# Altium PCB notus.PcbDoc
Units mil, origin at the board's own origin, x right, y up, seen from the top; angles counter-clockwise.
Board outline 3840 x 4540 mil, 2 copper layers (Top Layer, Bottom Layer); 131 components, 110 nets, 539 pads, 113 vias.
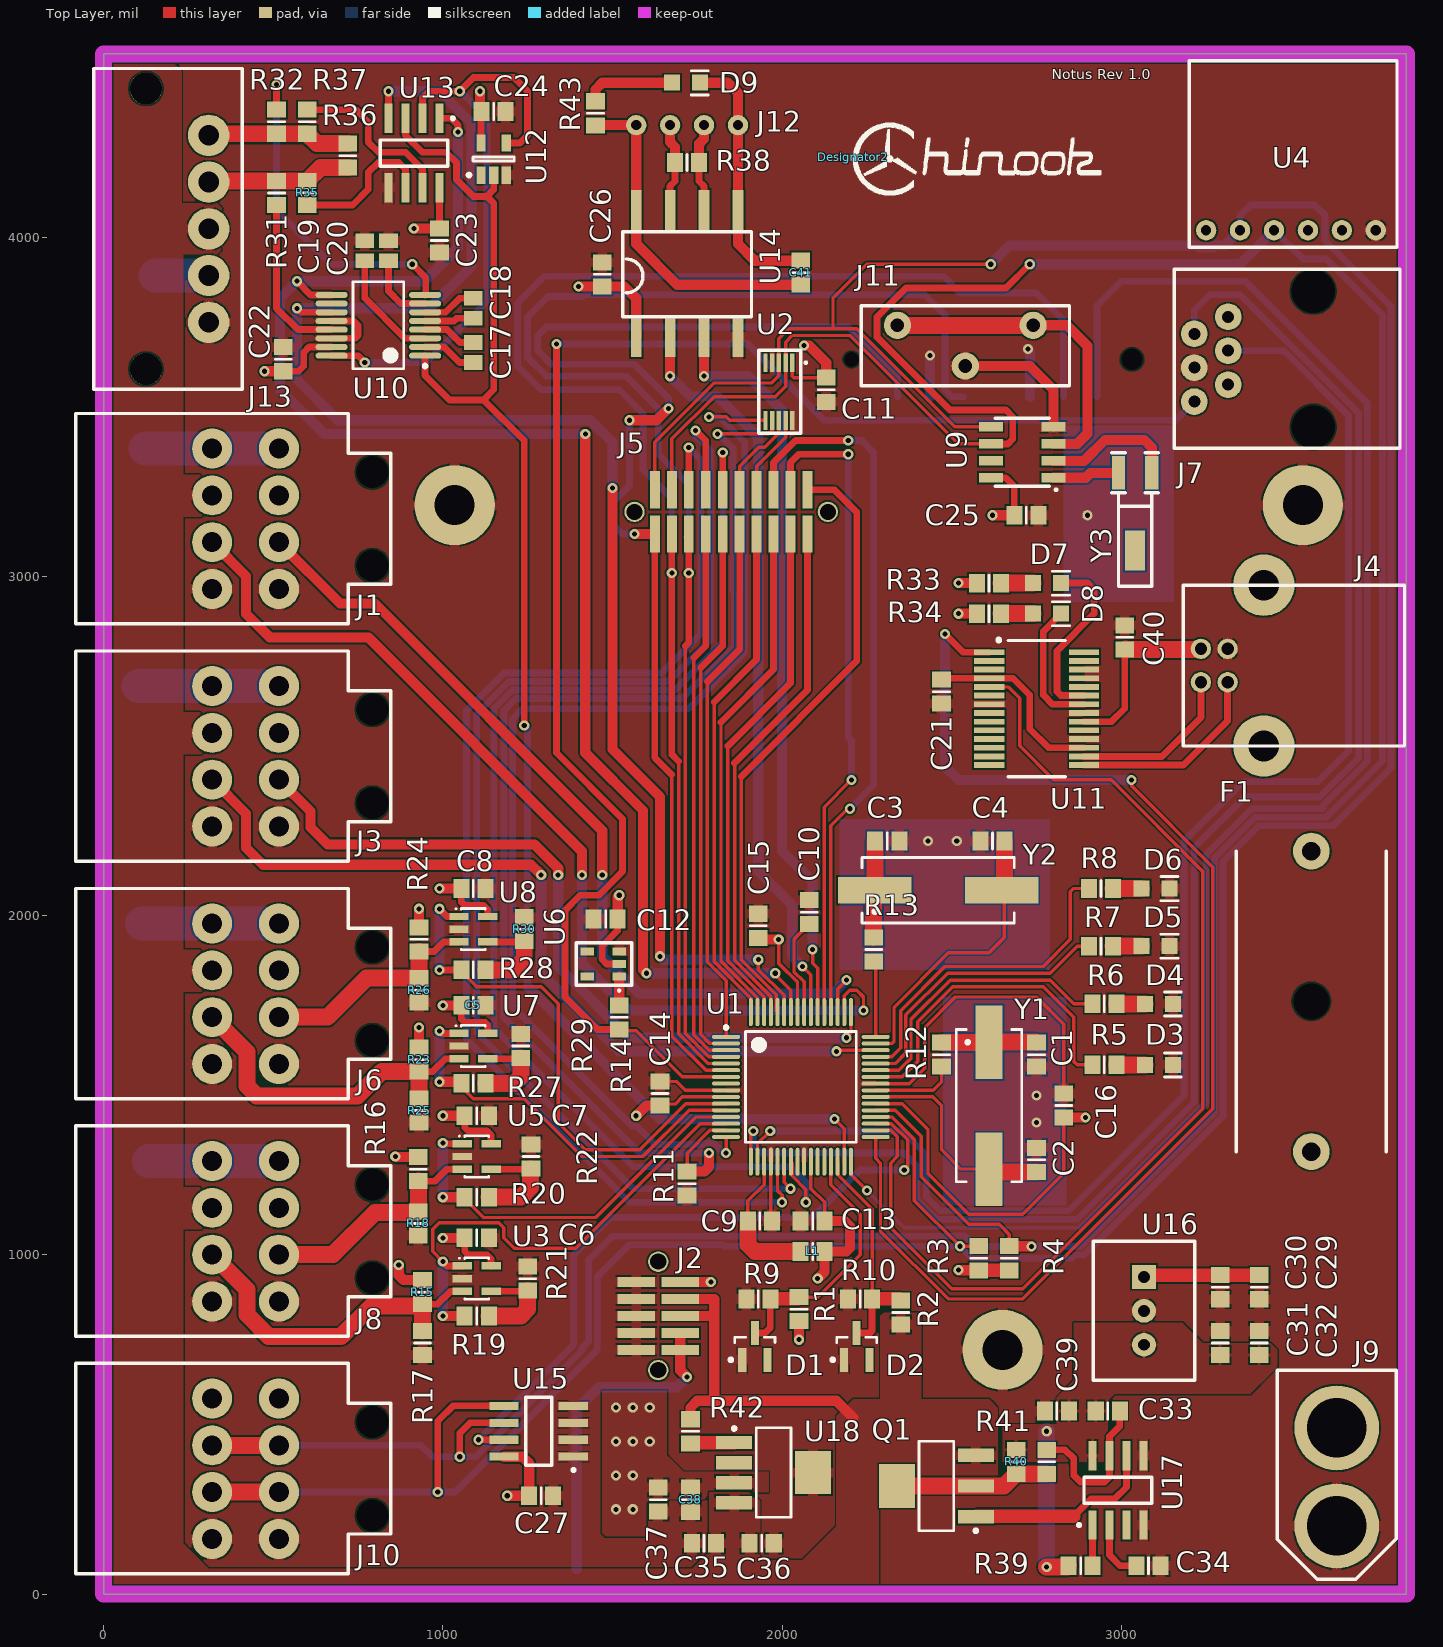
[diagram p0: Top Layer view]
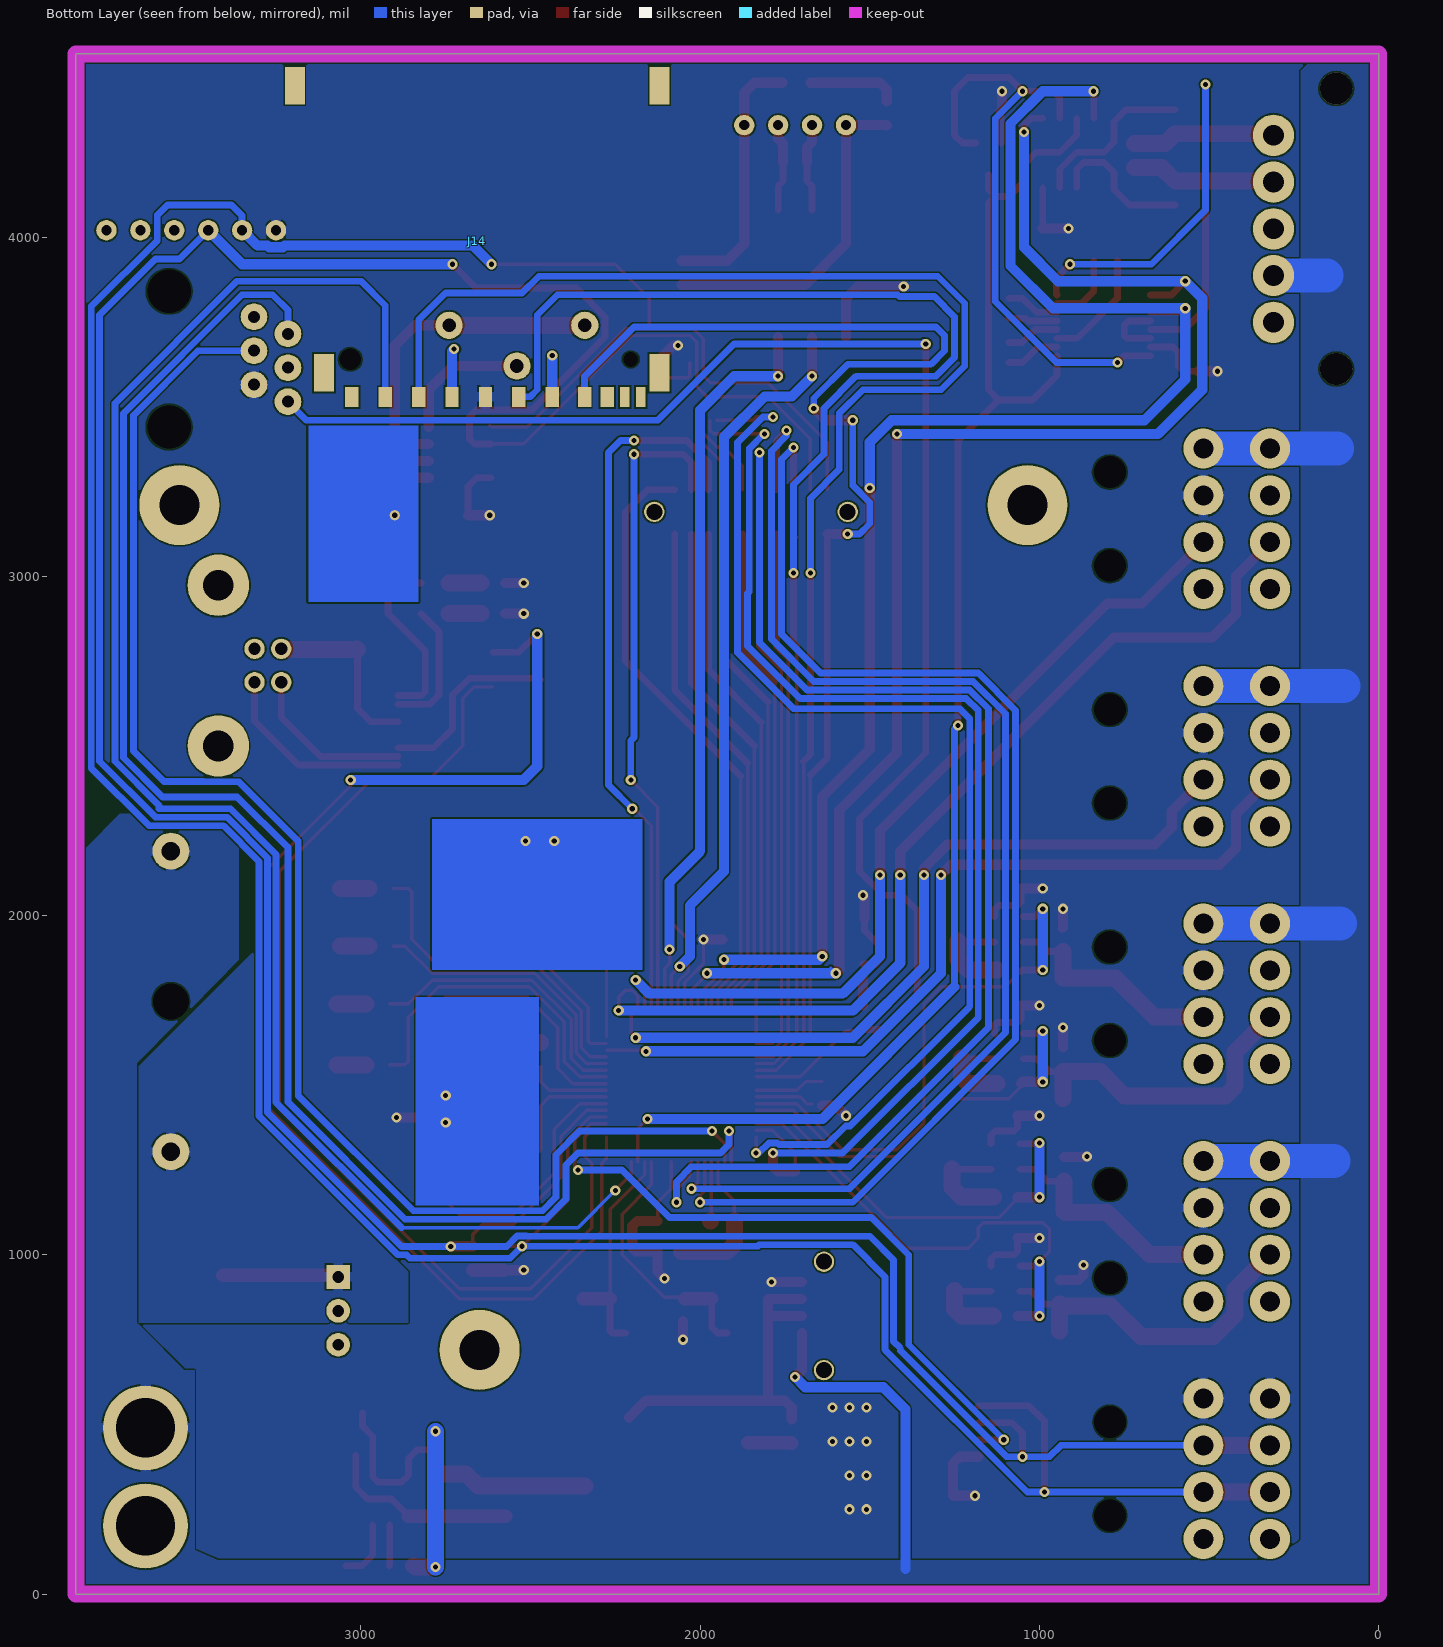
[diagram p1: Bottom Layer view, seen from below]

## Layer stack, top to bottom
Top Layer: signal copper 1.4
Dielectric: dielectric 12.6, FR-4, Dk 4.8
Bottom Layer: signal copper 1.4

## Board outline
0,0 0,4540 3840,4540 3840,0

## Design rules (kind name [scope] priority, off if disabled: settings)
Clearance [All] p1: gap=5
MinimumSolderMaskSliver [All] p1: minsoldermaskwidth=1
PlaneConnect [All] p1: planeconnectstyle=Relief reliefexpansion=20 reliefentries=4 reliefconductorwidth=30 reliefairgap=10
PolygonConnect [All] p1: connectstyle=Relief reliefconductorwidth=30 reliefentries=4 polygonreliefangle="90 Angle"
RoomDefinition Power [InComponentClass('Power')] p1: confinementstyle=ConfineIn formatcopy=TRUE lockcomponents=FALSE outline -820,-1000 15875,-1000 15875,9835 -820,9835
RoomDefinition Memory [InComponentClass('Memory')] p2: confinementstyle=ConfineIn formatcopy=TRUE lockcomponents=FALSE outline -770,-1000 15725,-1000 15725,9775 -770,9775
RoomDefinition MCU [InComponentClass('MCU')] p3: confinementstyle=ConfineIn formatcopy=TRUE lockcomponents=FALSE outline -889.57,-1000 16870,-1000 16870,10060 -889.57,10060
RoomDefinition Connectors [InComponentClass('Connectors')] p4: confinementstyle=ConfineIn formatcopy=TRUE lockcomponents=FALSE outline -890,-1000 16925,-1000 16925,10115 -890,10115
RoomDefinition Communication [InComponentClass('Communication')] p5: confinementstyle=ConfineIn formatcopy=TRUE lockcomponents=FALSE outline -890,-1000 16910,-1000 16910,10225 -890,10225
RoutingVias [All] p1: holewidth=28 width=50 viastyle="Through Hole" minholewidth=10 minwidth=20 maxholewidth=28 maxwidth=50
SilkToSilkClearance [All] p1: silktosilkclearance=7
SilkscreenOverComponentPads [All] p1: minsilkscreentomaskgap=7
SolderMaskExpansion [All] p1: expansion=4
Width [All] p1: maxlimit=500 minlimit=5 preferedwidth=20
24 further rules are at their usual default settings.

## Classes and differential pairs
component class Power: C29 C30 C31 C32 C33 C34 C35 C36 C37 C38 C39 F1 Q1 R39 R40 R41 R42 U16 U17 U18
component class Memory: C27 J14 U15
component class MCU: C1 C2 C3 C4 C5 C6 C7 C8 C9 C10 C11 C12 C13 C14 C15 C16 D1 D2 D3 D4 D5 D6 L1 R1 R2 R3 R4 R5 R6 R7 R8 R9 R10 R11 R12 R13 R14 R15 R16 R17 R18 R19 R20 R21 R22 R23 R24 R25 R26 R27 R28 R29 R30 U1 U2 U3 U4 U5 U6 U7 U8 U9 Y1 Y2 Y3
component class Connectors: J1 J2 J3 J4 J5 J6 J7 J8 J9 J10 J11 J12 J13
component class Communication: C17 C18 C19 C20 C21 C22 C23 C24 C25 C26 C40 C41 D7 D8 D9 R31 R32 R33 R34 R35 R36 R37 R38 R43 U10 U11 U12 U13 U14

## Components (designator, comment, footprint, x,y, rotation, side; value= is the part's Value field where it differs from the comment)
C1 "Cap" RESC2012N 2750,1590 r90 top
C2 "Cap" RESC2012N 2750,1280 r270 top
C3 "Cap" RESC2012N 2310,2220 r180 top
C4 "Cap" RESC2012N 2620,2220 r0 top
C5 "Cap" RESC2012N 1090,1735.43 r180 top
C6 "Cap" RESC2012N 1100,1050 r180 top
C7 "Cap" RESC2012N 1100,1410 r180 top
C8 "Cap" RESC2012N 1090,2080 r180 top
C9 "Cap" RESC2012N 1934.57,1100 r180 top
C10 "Cap" RESC2012N 2080,2010 r270 top
C11 "Cap" RESC2012N 2130,3550 r90 top
C12 "Cap" RESC2012N 1480,1990 r0 top
C13 "Cap" RESC2012N 2090,1100 r0 top
C14 "Cap" RESC2012N 1640,1475.43 r270 top
C15 "Cap" RESC2012N 1930,1970 r270 top
C16 "Cap" RESC2012N 2830,1440 r270 top
C17 "Cap" C0805 1090,3660 r90 top
C18 "Cap" C0805 1090,3790 r90 top
C19 "Cap" C0805 770,3960 r90 top
C20 "Cap" C0805 840,3960 r270 top
C21 "Cap" RESC2012N 2470,2660 r90 top
C22 "Cap" RESC2012N 530,3640 r270 top
C23 "Cap" RESC2012N 990,3990 r90 top
C24 "Cap" RESC2012N 1150,4370 r180 top
C25 "Cap" RESC2012N 2720,3180 r180 top
C26 "Cap" RESC2012N 1470,3890 r270 top
C27 "Cap" RESC2012N 1290,290 r180 top
C29 "Cap" RESC2012N 3406.38,904.57 r90 top
C30 "Cap" RESC2012N 3291.38,904.57 r90 top
C31 "Cap" RESC2012N 3291.38,740 r270 top
C32 "Cap" RESC2012N 3406.38,740 r270 top
C33 "Cap" RESC2012N 2960,540 r180 top
C34 "Cap" RESC2012N 3080,83.62 r180 top
C35 "Cap" RESC2012N 1770,150 r0 top
C36 "Cap" RESC2012N 1940,150 r180 top
C37 "Cap" RESC2012N 1635,278.62 r90 top
C38 "Cap" RESC2012N 1730,278.19 r90 top
C39 "Cap" RESC2012N 2810,540 r0 top
C40 "Cap" RESC2012N 3010,2820 r270 top
C41 "Cap" RESC2012N 2055,3895 r270 top
D1 "3V3" SOT23-3M 1920,730 r90 top
D2 "3V3" SOT23-3M 2220,730 r90 top
D3 "RED" 0805_Diode 3070,1560 r0 top
D4 "BLUE" 0805_Diode 3070,1740 r0 top
D5 "BLUE" 0805_Diode 3060,1910 r0 top
D6 "BLUE" 0805_Diode 3060,2080 r0 top
D7 "RED" 0805_Diode 2740,2980 r0 top
D8 "GREEN" 0805_Diode 2740,2890 r0 top
D9 "GREEN" 0805_Diode 1675,4455 r0 top
Designator2 "Comment" Chinook_Logo 2210,4235 r0 top
F1 "Fuse" "Fuse Holder 656" 3560,2190 r270 top
J1 "RPM 2-3" 1633600000 320,3170 r270 top
J2 "Power Sec." 104652-1 1700,720 r90 top
J3 "RPM 0-1" 1633600000 320,2470 r270 top
J4 "USB" AU-Y1007-R 3420,2500 r90 top
J5 "IO PORT" 104652-2 1850,3190 r0 top
J6 "ADC 4-5" 1633600000 320,1770 r270 top
J7 "PROG" A31411-ND 3215,3515 r90 top
J8 "ADC 2-3" 1633600000 320,1070 r270 top
J9 "Power Main" XT60_CON 3635,490 r270 top
J10 "I2C" 1633600000 320,370 r270 top
J11 "Power RTC" BS-1225-PC 2540,3680 r180 top
J12 "CANBUS" CON4_100MILS 1570,4330 r0 top
J13 "CON5" 1607070000 310,4300 r270 top
J14 "SD Card" "SD Card" 2120,3600 r0 bottom
L1 "Ferrite" RESC2012N 2090,1010 r180 top
Q1 "MOSFET-N" SOT223-4M 2455,318.62 r180 top
R1 "Res1" RESC2012N 2050,840 r90 top
R2 "Res1" RESC2012N 2350,830 r90 top
R3 "Res1" RESC2012N 2580,990 r90 top
R4 "Res1" RESC2012N 2670,990 r90 top
R5 "Res1" RESC2012N 2950,1560 r0 top
R6 "Res1" RESC2012N 2950,1740 r0 top
R7 "Res1" RESC2012N 2940,1910 r0 top
R8 "Res1" RESC2012N 2940,2080 r0 top
R9 "Res1" RESC2012N 1930,870 r180 top
R10 "Res1" RESC2012N 2230,870 r180 top
R11 "Res1" RESC2012N 1720,1210 r270 top
R12 "Res1" RESC2012N 2470,1590 r90 top
R13 "Res1" RESC2012N 2270,1900 r90 top
R14 "Res1" RESC2012N 1520,1700 r270 top
R15 "Res1" RESC2012N 940,890 r270 top
R16 "Res1" RESC2012N 927.68,1252.6 r270 top
R17 "Res1" RESC2012N 940,740 r270 top
R18 "Res1" RESC2012N 927.68,1092.6 r270 top
R19 "Res1" RESC2012N 1100,820 r180 top
R20 "Res1" RESC2012N 1100,1170 r180 top
R21 "Res1" RESC2012N 1250,930 r90 top
R22 "Res1" RESC2012N 1260,1290 r90 top
R23 "Res1" RESC2012N 930,1575.43 r270 top
R24 "Res1" RESC2012N 930,1930 r270 top
R25 "Res1" RESC2012N 930,1425.43 r270 top
R26 "Res1" RESC2012N 930,1780 r270 top
R27 "Res1" RESC2012N 1090,1505.43 r180 top
R28 "Res1" RESC2012N 1090,1840 r180 top
R29 "Res1" RESC2012N 1230,1615.43 r90 top
R30 "Res1" RESC2012N 1240,1960 r90 top
R31 "Res1" RESC2012N 510,4130 r90 top
R32 "Res1" RESC2012N 510,4340 r270 top
R33 "Res1" RESC2012N 2610,2980 r0 top
R34 "Res1" RESC2012N 2610,2890 r0 top
R35 "Res1" RESC2012N 600,4130 r90 top
R36 "Res1" RESC2012N 720,4240 r270 top
R37 "Res1" RESC2012N 600,4340 r270 top
R38 "Res1" RESC2012N 1720,4220 r0 top
R39 "Res1" RESC2012N 2880,83.62 r180 top
R40 "Res1" RESC2012N 2690,390 r270 top
R41 "Res1" RESC2012N 2780,390 r270 top
R42 "Res1" RESC2012N 1730,480 r90 top
R43 "Res1" RESC2012N 1450,4365 r90 top
U1 "dsPIC33EP512MC806" TQFP-PT64_M 2055.43,1495 r0 top
U2 "MCP4728" MSOP-10 2030,3630 r180 top
U3 "AD8541" RT-5 1100,930 r270 top
U4 "MMA8452Q Breakout board" "MMA8452Q Breakout board" 3250,4020 r0 top
U5 "AD8541" RT-5 1100,1290 r270 top
U6 "BD4930G-TR" SSOP5 1520,1820 r90 top
U7 "AD8541" RT-5 1090,1615.43 r270 top
U8 "AD8541" RT-5 1090,1960 r270 top
U9 "DS1338" 8SOIC-1 2800,3290.43 r90 top
U10 "MAX3221" SSOP16_M 810,3740 r180 top
U11 "FT232RL" ssop-28 2750.43,2610 r270 top
U12 "SN74LVC1G14" SOT23-5AM 1150,4230 r90 top
U13 "SN65HVD08D" 8SOIC-2 990,4350 r180 top
U14 "ISO1050" SOP-8 1570,3705.43 r0 top
U15 "CAT24C256W" 8SOIC-2 1385,405 r90 top
U16 "oki-78sr" oki-78sr 3066.81,835 r270 top
U17 "LTC1153" 8SOIC-2 2915,203.62 r0 top
U18 "LP38693" SOT223-5M 1975,358.19 r0 top
Y1 "" HC49/4H_SMX 2610,1440 r270 top
Y2 "" HC49/4H_SMX 2460,2074.57 r0 top
Y3 "" crystalcustom 3090,3305 r90 top

## Footprints (in the part's own frame and the unit in brackets; to place one, negate y for a bottom-side part, rotate by r counter-clockwise, add the part's x,y. Pads: shape width x height; smd on the part's side, far side on the other; paste and mask are expansions set on the pad)
8SOIC-1 [mm]
  rect 0.72x1.78 smd: 1(0,0) 2(1.27,0) 3(2.54,0) 4(3.81,0) 5(3.81,4.68) 6(2.54,4.68) 7(1.27,4.68) 8(0,4.68)
  silkscreen extent -0.95,-0.26 4.44,4.37, body extent -0.6,0.31 4.41,4.37, height 1.76
8SOIC-2 [mm]
  rect 0.6x2.2 smd: 1(0,0) 2(1.27,0) 3(2.54,0) 4(3.81,0) 5(3.81,5.2) 6(2.54,5.2) 7(1.27,5.2) 8(0,5.2)
  silkscreen extent -1.1,-0.1 4.44,3.57, body extent -0.64,0 4.44,5.2, height 1.45
0805_Diode [mm]
  rect 1.2x1.2 smd: 1(0,0) 2(2.1,0)
  silkscreen extent 1.45,-0.91 2.72,0.89, body extent -0.1,-0.62 2.23,0.63, height 0.51
104652-1 [mm] "10 pins femail header with lock pin"
  round 1.524 hole 1.2: 0(-1.52,1.65) 0(6.6,1.65)
  rect 0.74x2.79 smd: 1(0,0) 2(1.27,0) 3(2.54,0) 4(3.81,0) 5(5.08,0) 6(5.08,3.3) 7(3.81,3.3) 8(2.54,3.3) 9(1.27,3.3) 10(0,3.3)
  body extent -2.87,0.12 7.95,3.18, height 4.75
104652-2 [mm] "20 pins female header with lock pin"
  round 1.524 hole 1.2: 0(-7.24,0) 0(7.24,0)
  rect 0.74x2.79 smd: 1(-5.715,-1.65) 2(-4.445,-1.65) 3(-3.175,-1.65) 4(-1.905,-1.65) 5(-0.635,-1.65) 6(0.635,-1.65) 7(1.905,-1.65) 8(3.175,-1.65) 9(4.445,-1.65) 10(5.715,-1.65) 11(5.715,1.65) 12(4.445,1.65) 13(3.175,1.65) 14(1.905,1.65) 15(0.635,1.65) 16(-0.635,1.65) 17(-1.905,1.65) 18(-3.175,1.65) 19(-4.445,1.65) 20(-5.715,1.65)
  body extent -8.58,-1.53 8.58,1.53, height 4.75
1607070000 [mil] "Connector, header, pitch 3.5mm, right angle"
  round 94.49 hole 94.49 unplated: 0(-137.8,-185.04) 0(688.98,-185.04)
  round 122 hole 61: 1(0,0) 2(137.8,0) 3(275.59,0) 4(413.39,0) 5(551.18,0)
  silkscreen extent -197,-339 748,98
1633600000 [mm] "Weidmuller 8 poles connector"
  round 0 hole 2.4 unplated: 0(-3.484,12) 0(3.516,12)
  round 3 hole 1.5: 1(-5.25,0) 2(-1.745,0) 3(1.76,0) 4(5.266,0) 5(-5.25,5) 6(-1.745,5) 7(1.76,5) 8(5.266,5)
  silkscreen extent -7.87,-10.2 7.87,13.39
A31411-ND [mm] "Pic Prog connector"
  round 2 hole 0.9: 1(0,0) 2(1.27,-2.54) 3(2.54,0) 4(3.81,-2.54) 5(5.08,0) 6(6.35,-2.54)
  round 1.524 hole 3.25: 7(8.26,-8.9) 8(-1.9,-8.9)
  silkscreen extent -3.5,-15.4 9.9,1.5, body extent -3.5,-15.4 9.9,1.5, height 16.5
AU-Y1007-R [mm]
  round 4.6 hole 2.3: 0(0,0) 0(12.04,0)
  round 1.524 hole 0.92: 1(7.27,4.71) 2(4.77,4.71) 3(4.77,2.71) 4(7.27,2.71)
  silkscreen extent 0,-10.54 12.04,6.02, body extent 0,-10.54 12.04,6.02, height 10.9
BS-1225-PC [mm] "3V battery socket"
  round 2.04 hole 1.02: 1(-5.08,-1.525) 1(5.08,-1.525) 2(0,1.525)
  silkscreen extent -7.8,-3 7.8,3, body extent -7.54,-2.7 7.54,2.7, height 8.33
C0805 [mm] "Chip Capacitor, Body 2.0x1.3mm, IPC High Density"
  rect 1.1x1.4 smd: 1(-0.75,0) 2(0.75,0)
  body extent -1.1,-0.72 1.1,0.72, height 1.4
Chinook_Logo [mil]
  silkscreen extent -1,-111 732,102
CON4_100MILS [mil]
  round 60 hole 30: 1(0,0) 2(100,0) 3(200,0) 4(300,0)
crystalcustom [mm]
  rect 3x1.5 smd: 0(-5.806,1.277)
  rect 2.5x1 smd: 1(0,0) 2(0,2.5)
  silkscreen extent -8.5,-0.5 1.5,3
"Fuse Holder 656" [mm]
  round 1.524 hole 2.7 unplated: 0(11.25,0)
  round 2.76 hole 1.38: 1(0,0) 2(22.5,0)
  silkscreen extent 0,-5.63 22.5,5.63
HC49/4H_SMX [mm] "Quartz Crystal, SM; Body 13.4 (inc. leads) x 4.9 mm (LxW max)"
  rect 5.5x2 smd: 1(-4.75,0) 2(4.75,0)
  silkscreen extent -5.7,-2.45 5.7,2.45
"MMA8452Q Breakout board" [mil]
  round 60 hole 30: 1(0,0) 2(100,0) 3(200,0) 4(300,0) 5(400,0) 6(500,0)
  silkscreen extent -50,-50 562,500
MSOP-10 [mm]
  rect 0.33x1.4 smd mask+0.08: 1(0,0) 2(0.5,0) 3(1,0) 4(1.5,0) 5(2,0) 6(2,4.33) 7(1.5,4.33) 8(1,4.33) 9(0.5,4.33) 10(0,4.33)
  silkscreen extent -1.06,-0.94 2.5,5.28, body extent -0.16,0 2.19,4.33, height 1.1
oki-78sr [mil] "5V regulator"
  rect 70x70 hole 35: 1(-100,0)
  round 70 hole 35: 2(0,0) 3(100,0)
  silkscreen extent -205,-150 205,150, body extent -205,-150 205,150, height 650
RESC2012N [mm] "Chip Resistor, Body 2.0x1.3mm, IPC Medium Density"
  rect 1.2x1.4 smd: 1(-0.9,0) 2(0.9,0)
  silkscreen extent 0,-0.6 0,0.6, body extent -1.07,-0.7 1.07,0.7, height 0.65
RT-5 [mm] "SOT-23/SC-74A; 5 Leads; Body 3.1 x 3 mm, inc. leads (LxW max)"
  rect 0.55x1.45 smd: 1(-0.95,-1.075) 2(0,-1.075) 3(0.95,-1.075) 4(0.95,1.075) 5(-0.95,1.075)
  silkscreen extent -1.57,-1.35 1.55,0.9
"SD Card" [mm] "SD Card connector"
  rect 1.5x2.8 smd: 0(0,-21.5) 0(0,0) 0(25.1,0) 0(27.3,-21.5)
  rect 1x1.5 smd: 1(20.525,1.8) 2(18.025,1.8) 3(15.525,1.8) 4(13.025,1.8) 5(10.525,1.8) 6(8.025,1.8) 7(5.6,1.8) 8(3.9,1.8) 9(23.025,1.8)
  rect 0.7x1.5 smd: 10(1.4,1.8) 10(2.6,1.8)
  round 0 hole 1.1 unplated: 10(2.15,-1)
  round 0 hole 1.6 unplated: 10(23.15,-1)
SOP-8 [mm]
  rect 0.8x3 smd: 1(0,0) 2(2.54,0) 3(5.08,0) 4(7.62,0) 5(7.62,9.5) 6(5.08,9.5) 7(2.54,9.5) 8(0,9.5)
  silkscreen extent -1.02,1.52 8.64,7.87, body extent -1.14,1.4 8.76,8, height 4.9
SOT23-3M [mm] "SOT23, 3-Leads, Body 2.9x1.3mm, Pitch 0.95mm, Lead Span 2.5mm, IPC Low Density"
  rect 1.8x0.6 smd: 1(-1,0.95) 2(-1,-0.95) 3(1,0)
  silkscreen extent -1.12,-1.5 0.7,1.92, body extent -0.7,-1.5 0.7,1.5, height 1.1
SOT23-5AM [mm] "SOT23, 5-Leads, Body 2.9x1.7mm, Pitch 0.95mm, Lead Span 2.8mm, IPC Low Density"
  rect 1.3x0.7 smd: 1(-1.2,0.95) 2(-1.2,0) 3(-1.2,-0.95) 4(1.2,-0.95) 5(1.2,0.95)
  silkscreen extent -1.32,-1.55 0.15,1.97, body extent -0.9,-1.55 0.9,1.55, height 1.45
SOT223-4M [mm] "SOT223, 4-Leads, Body 6.5x3.5mm, Pitch 2.3mm, Lead Span 7mm, IPC Low Density"
  rect 2.7x1 smd: 1(-2.95,2.3) 2(-2.95,0) 3(-2.95,-2.3)
  rect 2.7x3.3 smd: 4(2.95,0)
  silkscreen extent -3.08,-3.35 1.3,3.47, body extent -1.85,-3.35 1.85,3.35, height 1.8
SOT223-5M [mm] "SOT223, 5-Leads, Body 6.5x3.5mm, Pitch 1.5mm, Lead Span 7mm, IPC Low Density"
  rect 2.7x1 smd: 1(-2.95,2.25) 2(-2.95,0.75) 3(-2.95,-0.75) 4(-2.95,-2.25)
  rect 2.7x3.2 smd: 5(2.95,0)
  silkscreen extent -3.07,-3.35 1.3,3.42, body extent -1.85,-3.35 1.85,3.35, height 1.8
SSOP5 [mm]
  rect 0.6x1 smd: 1(0,0) 2(0.95,0) 3(1.9,0) 4(1.9,2.4) 5(0,2.4)
  silkscreen extent -1.08,-0.94 2.54,3.22, body extent -0.3,0 2.18,2.4, height 1.25
SSOP16_M [mm] "SOP, 16-Leads, Body 6.2x5.3mm, Pitch 0.65mm, IPC Low Density"
  oval 2.4x0.45 smd: 1(-3.5,2.275) 2(-3.5,1.625) 3(-3.5,0.975) 4(-3.5,0.325) 5(-3.5,-0.325) 6(-3.5,-0.975) 7(-3.5,-1.625) 8(-3.5,-2.275) 9(3.5,-2.275) 10(3.5,-1.625) 11(3.5,-0.975) 12(3.5,-0.325) 13(3.5,0.325) 14(3.5,0.975) 15(3.5,1.625) 16(3.5,2.275)
  silkscreen extent -3.63,-3.25 1.9,3.25, body extent -2.7,-3.25 2.7,3.25, height 2
ssop-28 [mm]
  rect 0.432x2.261 smd: 1(-4.225,-3.55) 2(-3.575,-3.55) 3(-2.925,-3.55) 4(-2.275,-3.55) 5(-1.625,-3.55) 6(-0.975,-3.55) 7(-0.325,-3.55) 8(0.325,-3.55) 9(0.975,-3.55) 10(1.625,-3.55) 11(2.275,-3.55) 12(2.925,-3.55) 13(3.575,-3.55) 14(4.225,-3.55) 15(4.225,3.55) 16(3.575,3.55) 17(2.925,3.55) 18(2.275,3.55) 19(1.625,3.55) 20(0.975,3.55) 21(0.325,3.55) 22(-0.325,3.55) 23(-0.975,3.55) 24(-1.625,3.55) 25(-2.275,3.55) 26(-2.925,3.55) 27(-3.575,3.55) 28(-4.225,3.55)
  silkscreen extent -5.26,-2.97 5.1,2.13, body extent -5,-2.65 5,2.65, height 1.75
TQFP-PT64_M [mm] "Thin QFP, 64-Leads, Body 10x10mm, Pitch 0.5mm, IPC Low Density"
  oval 2.1x0.3 smd: 1(-5.6,3.75) 2(-5.6,3.25) 3(-5.6,2.75) 4(-5.6,2.25) 5(-5.6,1.75) 6(-5.6,1.25) 7(-5.6,0.75) 8(-5.6,0.25) 9(-5.6,-0.25) 10(-5.6,-0.75) 11(-5.6,-1.25) 12(-5.6,-1.75) 13(-5.6,-2.25) 14(-5.6,-2.75) 15(-5.6,-3.25) 16(-5.6,-3.75) 33(5.6,-3.75) 34(5.6,-3.25) 35(5.6,-2.75) 36(5.6,-2.25) 37(5.6,-1.75) 38(5.6,-1.25) 39(5.6,-0.75) 40(5.6,-0.25) 41(5.6,0.25) 42(5.6,0.75) 43(5.6,1.25) 44(5.6,1.75) 45(5.6,2.25) 46(5.6,2.75) 47(5.6,3.25) 48(5.6,3.75)
  oval 0.3x2.1 smd: 17(-3.75,-5.6) 18(-3.25,-5.6) 19(-2.75,-5.6) 20(-2.25,-5.6) 21(-1.75,-5.6) 22(-1.25,-5.6) 23(-0.75,-5.6) 24(-0.25,-5.6) 25(0.25,-5.6) 26(0.75,-5.6) 27(1.25,-5.6) 28(1.75,-5.6) 29(2.25,-5.6) 30(2.75,-5.6) 31(3.25,-5.6) 32(3.75,-5.6) 49(3.75,5.6) 50(3.25,5.6) 51(2.75,5.6) 52(2.25,5.6) 53(1.75,5.6) 54(1.25,5.6) 55(0.75,5.6) 56(0.25,5.6) 57(-0.25,5.6) 58(-0.75,5.6) 59(-1.25,5.6) 60(-1.75,5.6) 61(-2.25,5.6) 62(-2.75,5.6) 63(-3.25,5.6) 64(-3.75,5.6)
  silkscreen extent -5.72,-4.15 4.15,4.57, body extent -5,-5 5,5, height 1.2
XT60_CON [mil]
  round 250 hole 175: 1(0,0) 2(289,0)
  silkscreen extent -170,-175 446,175, body extent -165,-157 461,163, height 638

## Part data
C1 C2 C3 C4 C5 C6 C7 C8 C9 C10 C11 C12 C13 C14 C15 C16 C21 C22 C23 C24 C25 C26 C27 C29 C30 C31 C32 C33 C34 C35 C36 C37 C38 C39 C40 C41: "Capacitor"
C17 C18 C19 C20: library part "Cap Pol3", "Polarized Capacitor (Surface Mount)"
D1 D2: library part "D Zener", "Zener Diode"
D3 D4 D5 D6 D7 D8 D9: library part LED0, "Typical INFRARED GaAs LED"
F1: library part "Fuse 2"
J1 J3 J6 J8 J10: library part CON8, "8 pins connector"
J2: library part CON10, "10 pins connector"
J4 J12: library part CON4, "4 pins connector"
J5: library part CON20, "20 pins connector"
J7: library part CON6, "6 pins connectors"
J9 J11: library part CON2, "2 pins connector"
J13: "5 pins connector"
J14: "SPI Sd card connector pinout"
L1: library part Inductor, "Inductor"
Q1: "N-Channel MOSFET"
R1 R2 R3 R4 R5 R6 R7 R8 R9 R10 R11 R12 R13 R14 R15 R16 R17 R18 R19 R20 R21 R22 R23 R24 R25 R26 R27 R28 R29 R30 R31 R32 R33 R34 R35 R36 R37 R38 R39 R40 R41 R42 R43: "Resistor"
U1: "16 bits microcontroller with Digital signal controller"
U2: "12-Bit, Quad Digital-to-Analog Converter with EEPROM Memory"
U3 U5 U7 U8: "CMOS Rail-to-Rail General-Purpose Amplifiers"
U4: "Triple axis accelerometer breakout board"
U6: library part BD4950G-TR, "5V Voltage supervisor"
U9: "I2C RTC with 56-Byte NV RAM"
U10: "RS232 to TTL"
U11: "USB UART IC"
U12: "Inverter Gate"
U13: "RS485 to TTL"
U14: "ISOLATED CAN TRANSCEIVER"
U15: "256 kb I2C CMOS Serial  EEPROM"
U16: "5V 1.5A (Vin 7V-36V) swiching power supply - board mount"
U17: "Over current protection - Circuit breaker"
U18: "LDO 3.3V 500mA"
Y1 Y2 Y3: library part XTAL, "Crystal Oscillator"

## Free pads (board coordinates)
  round 236.22 hole 118.11: 0(1035,3210) 0(2650,720) 0(3535,3210)
  round 30 hole 15: 0(2900,3180)

## Via types
v1: diameter 30, hole 15, Top Layer to Bottom Layer, 113 vias

## Nets (pads, with @x,y where several pads share a name; then routed paths per layer and width w, separated by ;. In a path a pad name is that pad's centre, name@x,y a point inside that pad or via, vN(x,y) a via of type N, cw(c..) or ccw(c..) an arc to the next point about the centre after c; other vN are vias at no path point)
+3V3: C5.2 C6.2 C7.2 C8.2 C11.2 C12.2 C13.2 C14.2 C15.2 C16.2 C22.2 C23.2 C24.2 C25.2 C26.2 C27.2 C37.2 C38.2 J1.6 J2.5 J3.6 J6.6 J7.2 J8.6 J10.1 J10.5 J14.4 L1.1 R1.1 R3.1 R4.1 R15.1 R16.1 R23.1 R24.1 R33.1 R34.1 U1.10 U1.26 U1.38 U1.57 U2.1 U3.5 U4.1 U5.5 U6.2 U7.5 U8.5 U9.8 U10.15 U12.5 U13.8 U14.1 U15.8 U18.3 | length 5572.6
  Top Layer w10: R15.1 R15.1@944.57,930 ; 1670,1444.57 1684.57,1444.57 1705.47,1465.47 U1.10 ; C15.2 C15.2@1934.57,1930 ; v1(1990,1930) 1990,1858.79 2045.59,1803.2 U1.57 ; U2.1 2030,3590 2034.57,3585.43 C11.2 ; U1.26 2084.96,1195.04 2125.43,1154.57 C13.2 ; U1.38 2354.21,1445.79 2430,1370 2430,1240 2550,1120 2710,1120 2830,1240 C16.2
  Top Layer w20: C22.2 574.57,3604.57 590,3620 590,3660 606.02,3676.02 U10.15 ; R23.1 R23.1@934.57,1615.43 ; R24.1 R24.1@935.43,1960 ; C23.2 U13.8 ; v1(1000,1735) 1000,1740 v1@1004.57,1735.43 ; C5.2 1054.57,1695.43 1065,1685 1125,1685 1132.32,1677.68 U7.5 ; C8.2 1054.57,2040.43 1065,2030 1120,2030 1132.32,2017.68 U8.5 ; C6.2 1064.57,1010.43 1075,1000 1130,1000 1142.32,987.68 U3.5 ; C7.2 1064.57,1375.43 1075,1365 1130,1365 1142.32,1352.68 U5.5 ; U12.5 1112.6,4368.03 C24.2 ; C12.2 1515.43,1955.43 1470,1910 1470,1870 1482.6,1857.4 U6.2 ; U9.8 2659.57,3290.43 2684.57,3265.43 C25.2
  Top Layer w30: v1(474.57,3604.57) C22.2 ; v1(860,1290) 861.97,1288.03 R16.1 ; v1(870,970) 870,940 884.57,925.43 R15.1 ; v1(914.57,4025.43) C23.2 ; R23.1 v1(930,1670) ; R24.1 v1(930,2020) ; v1(990,2080) C8.2 ; v1(1000,1050) C6.2 ; v1(1000,1410) C7.2 ; v1@1004.57,1735.43 C5.2 ; v1(1110,4430) 1110,4374.57 C24.2 ; U15.8 1235,405 1254.57,385.43 C27.2 v1(1190,290) ; v1(1400,3854.57) C26.2 1535.43,3854.57 1570,3820 U14.1 ; C12.2 1515.43,2055.43 v1(1520,2060) ; v1(1570,1410) 1600,1440 C14.2 ; J2.5 v1(1790,920) ; C15.2@1934.57,1930 v1(1990,1930) ; v1(2050,750) R1.1 ; v1(2065,3680) 2080,3680 2130,3630 C11.2 ; v1(2105,930) 2125.43,950.43 L1.1 2190,1010 2200,1020 2200,1085 2185,1100 C13.2 ; v1(2520,955) 2520.43,954.57 R3.1 ; v1(2520,2890) R34.1 ; v1(2520,2980) R33.1 ; v1(2620,3180) C25.2 ; C16.2 v1(2894.57,1404.57)
  Top Layer w40: R3.1 R4.1
  other v1: 1510,250 1560,250 1510,350 1560,350 1510,450 1560,450 1610,450 1510,550 1560,550 1610,550
+3V3_OK: R14.1 U6.1 | length 84.6
  Top Layer w30: R14.1 U6.1
+3V3_SENSE: D1.3 R1.2 R9.1 U1.29 | length 758.4
  Top Layer w10: R1.2 2105.43,875.43 2230,1000 2230,1120 2144.02,1205.98 U1.29
  Top Layer w20: D1.3 1949.37,769.37 1965.43,785.43 R9.1
  Top Layer w40: R9.1 R1.2@2045.43,870
+5V: C35.2 C36.2 J1.2 J2.3 J2.4 J3.2 J6.2 J8.2 J13.3 Q1.3 R2.1 R42.2 U18.4 | length 1033.6
  Top Layer w30: J2.3 1790,820 ; J2.4 1800,870 1800,570 ; R42.2 1730,550 1750,570 1800,570 ; 2210,520 2160,570 1800,570
+5V_ISO: C41.2 J12.1 R43.1 U14.8 | length 1005.1
  Top Layer w30: R43.1 1450.43,4330 J12.1 U14.8 1570,3980 1690.43,3859.57 C41.2
+5V_SENSE: D2.3 R2.2 R10.1 U1.30 | length 674.8
  Top Layer w10: U1.30 2163.7,1236.29 2176.8,1223.19 2265.43,1134.57 R10.1
  Top Layer w20: D2.3 2259.37,769.37 2265.43,775.43 R10.1 R10.1@2270,865.43
  Top Layer w40: R10.1 R2.2@2344.57,870
+5V_USB: C40.2 J4.1 U11.20 | length 537.9
  Top Layer w20: U11.20 2971.61,2571.61 3010,2610 C40.2
  Top Layer w50: C40.2@3011.65,2786.22 C40.2 3232.91,2784.57 J4.1
ADC_SENSOR_2: J8.3 R15.2 R17.1 U3.3 | length 1014.9
  Top Layer w20: R15.2 984.57,854.57 1022.6,892.6 U3.3
  Top Layer w50: J8.3 422.8,897.9 422.8,823.73 486.53,760 700.65,760 790,849.35 934.78,849.35 R15.2 R17.1
ADC_SENSOR_3: J8.7 R16.2 R18.1 U5.3 | length 697.4
  Top Layer w20: R16.2 977.17,1217.17 1012.6,1252.6 U5.3
  Top Layer w50: J8.7 675.76,1000.69 800,1124.94 924.58,1124.94 R18.1 R16.2
ADC_SENSOR_4: J6.3 R23.2 R25.1 U7.3 | length 1007.2
  Top Layer w20: R23.2 970,1540 1008.03,1578.03 U7.3
  Top Layer w50: J6.3 422.8,1597.9 422.8,1497.2 451.36,1468.64 748.64,1468.64 820,1540 R23.2 R25.1
ADC_SENSOR_5: J6.7 R24.2 R26.1 U8.3 | length 669.1
  Top Layer w20: R24.2 974.57,1894.57 1002.6,1922.6 U8.3
  Top Layer w50: J6.7 660.69,1700.69 775.43,1815.43 R26.1 R24.2
ADC_VREF+: U1.16 U2.6 | length 3400.6
  Top Layer w10: v1(1785,3470) 1835,3470 1845.47,3459.53 U2.6 ; U1.16 v1(1835,1300) v1(1835,1300)
  Bottom Layer w20: v1(1785,3470) 1815,3470 1890,3395 1890,2775 1725,2610 1235,2610 1205,2580 1205,1732.57 1557.57,1380 1570.71,1380 1625.71,1325 1767.57,1325 1772.57,1330 1797.43,1330 1827.43,1300 v1(1835,1300)
ADC_VREF-: R11.1 U1.15 U2.7 | length 3583.5
  Top Layer w10: R11.1 1720,1300 1787.05,1367.05 U1.15 ; v1(1810,3420) 1960,3420 1970.94,3430.94 U2.7
  Top Layer w30: R11.1 1770.43,1245.43 1785,1260 v1(1785,1300)
  Bottom Layer w20: v1(1785,1300) 1580,1300 1180,1700 1180,2604.29 1215.71,2640 1705,2640 1860,2795 1860,2950 1855,2955 1855,3377.43 1812.43,3420 v1(1810,3420)
AN2: R19.2 U1.14 U3.1 | length 1472
  Top Layer w10: v1(1000,980) 970,1010 970,1075 990,1095 1165,1095 1180,1080 1180,1050 1210,1020 1392.43,1020 1759.16,1386.73 U1.14 ; U3.1 U3.1@1060,969.72
  Top Layer w20: v1(1000,980) 1012.6,967.4 U3.1
  Top Layer w30: v1(1000,820) R19.2
  Bottom Layer w30: v1(1000,820) v1(1000,980)
AN3: R20.2 U1.13 U5.1 | length 1204
  Top Layer w10: R20.2 1064.57,1165.43 1120,1110 1450,1110 1746.42,1406.42 U1.13
  Top Layer w20: v1(1000,1330) 1002.6,1327.4 U5.1
  Top Layer w30: v1(1000,1170) R20.2
  Bottom Layer w30: v1(1000,1170) v1(1000,1330)
AN4: R27.2 U1.12 U7.1 | length 1209
  Top Layer w10: R27.2 1054.57,1495.43 1090,1460 1240,1460 1410,1290 1590,1290 1726.1,1426.1 U1.12
  Top Layer w20: v1(990,1660) 997.17,1652.83 U7.1
  Top Layer w30: v1(990,1510) 1050,1510 R27.2
  Bottom Layer w30: v1(990,1510) v1(990,1660)
AN5: R28.2 U1.11 U8.1 | length 1577.4
  Top Layer w10: R28.2 1054.57,1835.43 1100,1790 1290,1790 1340,1740 1340,1390 1420,1310 1580,1310 1715.79,1445.79 U1.11
  Top Layer w20: v1(990,1840) 1050,1840 R28.2@1054.57,1835.43 ; v1(990,2020) 1012.6,1997.4 U8.1
  Bottom Layer w30: v1(990,1840) v1(990,2020)
AN8: J5.18 U1.21 | length 3696.7
  Top Layer w10: U1.21 1986.54,1188.86 2000,1175.39 v1(2000,1155)
  Top Layer w20: J5.18 v1(1725,3380)
  Bottom Layer w20: v1(1725,3380) 1760,3345 1760,2830 1645,2715 1180,2715 1070,2605 1070,1635 1550,1155 v1(2000,1155)
AN9: J5.17 U1.22 | length 3755.1
  Top Layer w10: U1.22 2006.22,1213.78 v1(2025,1195) v1@2035,1195
  Top Layer w20: v1(1745,3430) 1775,3400 J5.17
  Bottom Layer w20: v1(1745,3430) 1745,3415 1790,3370 1790,2815 1665,2690 1195,2690 1100,2595 1100,1655 1560,1195 v1(2025,1195)
AN10: J5.16 U1.23 | length 3671.9
  Top Layer w10: U1.23 2029.68,1270.75 2029.68,1232.51 2069.96,1192.23 v1(2070,1155) v1(2070,1155)
  Top Layer w20: J5.16 v1(1825,3365)
  Bottom Layer w20: v1(1825,3365) 1825,2805 1685,2665 1205.36,2665 1150,2609.64 1150,1670 1560,1260 2025,1260 2070,1215 v1(2070,1155)
AVDD: C9.2 L1.2 U1.19 | length 427.6
  Top Layer w10: C9.2 1899.13,1159.13 1947.17,1207.17 U1.19
  Top Layer w50: C9.2 1899.13,1030.87 1920,1010 L1.2
CANH: J12.2 R38.1 U14.7 | length 262.6
  Top Layer w20: U14.7 1670,4150 1684.57,4164.57 R38.1
  Top Layer w30: J12.2 1670,4280 1684.57,4265.43 R38.1
CANL: J12.3 R38.2 U14.6 | length 262.6
  Top Layer w20: R38.2 1755.43,4164.57 1770,4150 U14.6
  Top Layer w30: R38.2 1755.43,4275.43 1770,4290 J12.3
CANRX: U1.55 U14.2 | length 2208.7
  Top Layer w10: v1(2060,1850) 2084.96,1825.04 U1.55
  Top Layer w30: v1(1670,3590) U14.2
  Bottom Layer w30: v1(1670,3590) 1730,3530 1810,3530 1930,3410 1930,2130 2030,2030 2030,1880 v1(2060,1850)
CANTX: U1.54 U14.3 | length 2204.7
  Top Layer w10: v1(2090,1900) 2090,1860 2104.65,1845.35 U1.54
  Top Layer w30: v1(1770,3590) U14.3
  Bottom Layer w30: v1(1770,3590) 1900,3590 2000,3490 2000,2190 2090,2100 v1(2090,1900)
DAC_VOUTC: J5.15 U2.8 | length 263.5
  Top Layer w10: J5.15 1875,3325 1930.61,3380.61 1949.39,3380.61 1990.63,3421.84 U2.8
DAC_VOUTD: J5.14 U2.9 | length 239.9
  Top Layer w10: J5.14 1925,3325 2010.32,3410.31 U2.9
EEPROM_WP: U1.35 U15.7 | length 2021.7
  Top Layer w10: U1.35 2322.05,1386.73 2370,1338.79 2370,1260 v1(2360,1250)
  Top Layer w20: v1(1105,455) U15.7
  Bottom Layer w20: v1(1105,455) 1385,735 1385,1000 1495,1110 2090,1110 2230,1250 v1(2360,1250)
GND: C1.1 C2.1 C3.1 C4.1 C5.1 C6.1 C7.1 C8.1 C9.1 C10.1 C11.1 C12.1 C13.1 C14.1 C15.1 C16.1 C19.2 C20.1 C21.1 C22.1 C23.1 C24.1 C25.1 C26.1 C27.1 C29.1 C30.1 C31.1 C32.1 C34.1 C35.1 C36.1 C37.1 C38.1 C39.1 C40.1 D1.1 D2.1 D3.2 D4.2 D5.2 D6.2 J1.4 J1.8 J2.6 J2.7 J2.8 J2.9 J2.10 J3.4 J3.8 J4.4 J6.4 J6.8 J7.3 J8.4 J8.8 J9.2 J10.4 J10.8 J11.2 J13.5 J14.3 J14.6 pad.0 R9.2 R10.2 R11.2 R17.2 R18.2 R21.2 R22.2 R25.2 R26.2 R29.2 R30.2 U1.9 U1.20 U1.25 U1.41 U2.4 U2.10 U3.2 U4.6 U5.2 U6.3 U7.2 U8.2 U9.4 U10.12 U10.14 U11.7 U11.18 U11.21 U11.25 U11.26 U12.3 U13.5 U14.4 U15.1 U15.2 U15.3 U15.4 U16.2 U17.4 U17.5 U18.5 | length 2207.4
  Top Layer w10: C14.1 1689.13,1510.87 1714.84,1485.16 U1.9 ; U1.20 1966.85,1103.15 C9.1 ; U1.41 2374.84,1504.84 2420,1550 2420,1670 2510,1760 2750,1760 2830,1680 C16.1
  Top Layer w20: U10.14 741.61,3701.61 750,3710 750,3740 737.2,3752.8 U10.12
  Top Layer w30: J11.2 2730.04,3619.96 2800,3550 U9.4
  Bottom Layer w30: J14.6 v1(2435.94,3650.94) ; v1(2725,3670) 2731.22,3663.78 J14.3
  other v1: 2750,1390 2750,1470 2430,2220 2515,2220
GND_ISO: C41.1 D9.2 J12.4 U14.5 | length 775.3
  Top Layer w30: D9.2 1840,4455 1870,4425 J12.4 U14.5 1870,3980 1919.57,3930.43 C41.1
LED_STAT0: R5.1 U1.42 | length 988.3
  Top Layer w10: U1.42 2354.53,1524.53 2400,1570 2400,1686.48 2503.52,1790 2770,1790 2860,1700 2860,1570 2870,1560 R5.1
LED_STAT1: R6.1 U1.43 | length 844.7
  Top Layer w10: U1.43 2344.21,1544.21 2380,1580 2380,1694.32 2495.68,1810 2790,1810 2860,1740 R6.1
LED_STAT2: R7.1 U1.44 | length 837.7
  Top Layer w10: U1.44 2333.9,1563.9 2365,1595 2365,1707.16 2487.84,1830 2790,1830 2870,1910 R7.1
LED_STAT3: R8.1 U1.45 | length 980.7
  Top Layer w10: U1.45 2323.58,1583.58 2350,1610 2350,1720 2480,1850 2770,1850 2850,1930 2850,2070 2860,2080 R8.1
MCLR: J7.1 R14.2 U1.7 | length 4679.1
  Top Layer w10: R14.2@1520,1660 1570,1660 1705.47,1524.53 U1.7
  Top Layer w20: v1(1335,3685) 1335,2480 1530,2285 1530,2130 1460,2060 1405,2060 1360,2015 1360,1760 1455.43,1664.57 R14.2
  Bottom Layer w20: v1(1335,3685) 1340,3690 1345,3685 1900,3685 2125,3460 3160,3460 J7.1
NetC1_2: C1.2 R12.2 Y1.1 | length 281.3
  Top Layer w50: R12.2 2608.43,1625.43 Y1.1 2748.43,1627.01 C1.2
NetC3_2: C3.2 R13.2 Y2.1 | length 286.5
  Top Layer w50: R13.2 2270,2071.57 Y2.1 2274.57,2076.14 C3.2
NetC17_1: C17.1 U10.2 | length 161.1
  Top Layer w20: U10.2 1003.98,3676.02 1049.53,3630.47 C17.1
NetC17_2: C17.2 U10.4 | length 157.8
  Top Layer w20: U10.4 1012.8,3727.2 1050.47,3689.53 C17.2
NetC18_1: C18.1 U10.5 | length 145.4
  Top Layer w20: U10.5 1032.8,3752.8 1040.47,3760.47 C18.1
NetC18_2: C18.2 U10.6 | length 159.2
  Top Layer w20: U10.6 1008.39,3778.39 1049.53,3819.53 C18.2
NetC19_1: C19.1 U10.3 | length 337.3
  Top Layer w20: C19.1 770,3820 888.39,3701.61 U10.3
NetC20_2: C20.2 U10.7 | length 212.9
  Top Layer w20: C20.2@839.53,3930 839.53,3840.47 876.02,3803.98 U10.7
NetC21_2: C21.2 U11.4 U11.17 | length 565.3
  Top Layer w20: C21.2 2474.13,2699.57 U11.4 2680.43,2699.57 2730,2650 2730,2550 2785.16,2494.84 U11.17
NetC29_2: C29.2 C30.2 F1.2 U16.1 | length 341.6
  Top Layer w40: U16.1 3071.81,940 C30.2 C29.2
NetC33_1: C33.1 R41.1 U17.7 | length 461.3
  Top Layer w20: R41.1 2834.57,425.43 2860,400 2860,350 2880,330 2950,330 2965,345 U17.7 2965,465 2995.43,495.43 C33.1@2995.43,533.62
NetC34_2: C34.2 U17.2 | length 181.2
  Top Layer w20: U17.2 2965,115 2996.38,83.62 C34.2
NetD3_1: D3.1 R5.2 | length 84.6
  Top Layer w50: R5.2 D3.1
NetD4_1: D4.1 R6.2 | length 84.6
  Top Layer w50: R6.2 D4.1
NetD5_1: D5.1 R7.2 | length 84.6
  Top Layer w50: R7.2 D5.1
NetD6_1: D6.1 R8.2 | length 84.6
  Top Layer w50: R8.2 D6.1
NetD7_1: D7.1 R33.2 | length 94.6
  Top Layer w50: R33.2 D7.1
NetD7_2: D7.2 U11.23 | length 536.2
  Top Layer w20: D7.2 2900,2980 2920,2960 2920,2890 2810,2780 2810,2660 2821.61,2648.39 U11.23
NetD8_1: D8.1 R34.2 | length 94.6
  Top Layer w50: R34.2 D8.1
NetD8_2: D8.2 U11.22 | length 393.3
  Top Layer w20: D8.2 2770,2837.32 2770,2650 2797.2,2622.8 U11.22
NetD9_1: D9.1 R43.2 | length 267.9
  Top Layer w30: R43.2 1450,4435 1470,4455 D9.1
NetQ1_1: Q1.2 Q1.4 R40.2 R41.2 | length 456
  Top Layer w50: Q1.4 Q1.2 2654.06,318.62 R40.2 R41.2
NetQ1_2: Q1.1 U17.6 | length 573.2
  Top Layer w20: Q1.1 Q1.1@2573.07,230 ; 2860,230 2910,280 2980,280 3015,315 U17.6
  Top Layer w40: Q1.1@2573.07,230 2860,230
NetR19_1: R19.1 R21.1 U3.4 | length 285.9
  Top Layer w20: U3.4 1248.03,892.6 R21.1
  Top Layer w50: R19.1 1230,820 1250,840 R21.1
NetR20_1: R20.1 R22.1 U5.4 | length 307.3
  Top Layer w20: U5.4 1258.03,1252.6 R22.1
  Top Layer w50: R20.1 1230,1170 1258.03,1198.03 R22.1@1258.03,1252.6
NetR27_1: R27.1 R29.1 U7.4 | length 265.9
  Top Layer w20: U7.4 1228.03,1578.03 R29.1
  Top Layer w50: R27.1 1210,1505.43 1230,1525.43 R29.1
NetR28_1: R28.1 R30.1 U8.4 | length 290.1
  Top Layer w20: U8.4 1238.03,1922.6 R30.1
  Top Layer w50: R28.1 1210,1840 1240,1870 R30.1
NetR39_1: R39.1 U17.1 | length 120.2
  Top Layer w20: U17.1 2915,84.05 R39.1
NetR42_1: R42.1 U18.1 | length 129.8
  Top Layer w40: R42.1 1732.2,446.77 U18.1
NetU9_1: U9.1 Y3.2 | length 197.6
  Top Layer w30: U9.1 2895.43,3290.43 2910,3305 Y3.2
NetU9_2: U9.2 Y3.1 | length 399.4
  Top Layer w30: U9.2 2890.43,3340.43 2951.69,3401.69 3068.31,3401.69 3090,3380 Y3.1
NetU10_16: U10.16 U12.4 U13.2 | length 1807.4
  Top Layer w20: U10.16 749.57,3650.43 v1(770,3630) ; U13.2 940,4410 960,4430 v1(1050,4430) 1090,4470 1210,4470 1250,4430 1250,4300 1227.24,4277.24 U12.4
  Bottom Layer w20: v1(770,3630) 950,3630 1130,3810 1130,4350 v1(1050,4430)
OSCIN: C2.2 U1.39 Y1.2 | length 641.7
  Top Layer w10: U1.39 2444.53,1465.47 2470,1440 2470,1310 2527.01,1252.99 Y1.2
  Top Layer w50: Y1.2 2618.43,1244.57 C2.2
OSCOUT: R12.1 U1.40 | length 249
  Top Layer w10: U1.40 2445.16,1485.16 2470,1510 R12.1
PGEC: J7.5 U1.17 | length 4804.4
  Top Layer w10: U1.17 1907.8,1357.8 v1(1915,1365)
  Bottom Layer w20: v1(1915,1365) 1915,1325 1940,1300 2359.64,1300 2395,1264.64 2395,1164.64 2454.64,1105 2870,1105 3215,1450 3215,2200.36 3364.64,2350 3584.64,2350 3700,2465.36 3700,3480 3350,3830 3260,3830 3215,3785 J7.5
PGED: J7.4 U1.18 | length 4405.7
  Top Layer w10: U1.18 1927.48,1327.48 v1(1965,1365)
  Bottom Layer w20: v1(1965,1365) 2355,1365 2425,1295 2425,1170 2465,1130 2845,1130 3184.82,1469.82 3184.82,2219.82 3359.45,2394.45 3463.72,2394.45 3464.27,2395 3580,2395 3670,2485 3670,3474.64 3479.64,3665 J7.4
PRE_+5V: C31.2 C32.2 C33.2 C39.2 R39.2 R40.1 U16.3 U17.8 | length 466.1
  Top Layer w50: v1(2780,80) 2840.95,80 R39.2
  Bottom Layer w50: v1(2780,80) v1(2780,480)
PWM1H: J5.10 U1.61 | length 1542.9
  Top Layer w10: 1860,2450 1860,1868.35 1966.85,1761.5 U1.61
  Top Layer w20: 1860,2450 2075,2665 J5.10
PWM1L: J5.11 U1.60 | length 1831.4
  Top Layer w10: 1880,2410 1880,1869.57 1982.76,1766.81 1982.76,1719.25 U1.60
  Top Layer w20: 1880,2410 2220,2750 2220,3190 2155.04,3254.96 J5.11
PWM2H: J5.8 U1.63 | length 1518.3
  Top Layer w10: 1820,2570 1820,1865.93 1927.48,1758.45 U1.63
  Top Layer w20: 1820,2570 1975,2725 J5.8
PWM2L: J5.9 U1.62 | length 1530.6
  Top Layer w10: 1840,2500 1840,1867.14 1947.17,1759.98 U1.62
  Top Layer w20: 1840,2500 2025,2685 J5.9
PWM3H: J5.6 U1.1 | length 1544.5
  Top Layer w10: 1780,2690 1780,1863.5 1834.96,1808.54 U1.1
  Top Layer w20: 1780,2690 1875,2785 J5.6
PWM3L: J5.7 U1.64 | length 1506
  Top Layer w10: 1800,2630 1800,1864.71 1907.8,1756.92 U1.64
  Top Layer w20: 1800,2630 1925,2755 J5.7
PWM4H: J5.4 U1.3 | length 1604.6
  Top Layer w10: 1740,2760 1740,1648.79 1785.52,1603.27 U1.3
  Top Layer w20: 1740,2760 1775,2795 J5.4
PWM4L: J5.5 U1.2 | length 1588.1
  Top Layer w10: 1760,2730 1760,1650 1787.05,1622.95 U1.2
  Top Layer w20: 1760,2730 1825,2795 J5.5
RS232_IN: R32.1 U10.8 | length 1018.8
  Top Layer w20: R32.1 510,4440 v1(510,4450) ; v1(910,3920) 950,3880 950,3831.77 U10.8
  Bottom Layer w20: v1(510,4450) 510,4080 670,3920 v1(910,3920)
RS232_OUT: R31.1 U10.13 | length 492.8
  Top Layer w20: R31.1 510,3790 572.8,3727.2 U10.13
RS232_RS485_SEL: U1.31 U10.1 U12.2 U13.3 | length 4333.6
  Top Layer w10: v1(2155,1400) 2183.39,1371.61 U1.31
  Top Layer w20: U13.3 890,4300 940,4250 1010,4250 1040,4220 1040,4170 1090,4120 1130,4120 ; U10.1 947.8,3592.2 1020,3520 1120,3520 ; U12.2 1150,4140 1130,4120 ; v1(1240,2560) 1240,3400 1120,3520 ; 1120,3520 1150,3550 1150,4100 1130,4120
  Bottom Layer w20: v1(1240,2560) 1250,2550 1250,1790
  Bottom Layer w30: 1250,1790 1640,1400 v1(2155,1400)
RS485_A: R35.1 U13.6 | length 434.3
  Top Layer w20: R35.1 734.57,4094.57 780,4140 780,4190 810,4220 870,4220 890,4200 U13.6
RS485_A_RS232_OUT: J13.2 R31.2 R35.2 R36.2 | length 427.5
  Top Layer w50: J13.2 313.23,4165.43 R31.2 R35.2 639.13,4204.57 R36.2
RS485_B: R37.1 U13.7 | length 502.5
  Top Layer w20: R37.1 744.57,4375.43 780,4340 780,4280 810,4250 890,4250 940,4200 U13.7
RS485_B_RS232_IN: J13.1 R32.2 R36.1 R37.2 | length 424
  Top Layer w50: J13.1 314.57,4304.57 R32.2 R37.2 629.13,4275.43 R36.1
SCK: J5.3 J14.5 U1.4 | length 4293.5
  Top Layer w10: 1715,2795 1715,1652.57 1783.99,1583.58 U1.4 ; J5.3@1715,3115.04 J5.3
  Top Layer w20: 1715,2795 1725,2805 v1(1725,3010) J5.3
  Bottom Layer w20: v1(1725,3010) 1725,3270 1635,3360 1635,3495 1540,3590 1305,3590 1250,3645 1250,3765 1309.57,3824.57 1412.43,3824.57 1417.86,3830 2420,3830 2480,3770 2480,3550 2500.87,3529.13 J14.5
SCL: J5.19 J10.2 J10.6 R4.2 U1.37 U2.2 U4.3 U9.6 U15.6 | length 10983.5
  Top Layer w10: J5.19 1675,3405 1799.68,3529.69 1979.68,3529.69 2010.32,3560.31 U2.2 2010.32,3690.31 2030,3710 2200,3710 2519.57,3390.43 U9.6 ; U1.37 2333.9,1426.1 2410,1350 2410,1230 2550,1090 2640,1090 2670,1060 R4.2
  Top Layer w20: v1(1050,405) 1050,475 1080,505 U15.6 ; U9.6 2665.43,3390.43 2680,3405 2680,3470 2660,3490 2495,3490 2280,3705 2280,3765 2365,3850 2660,3850 v1(2730,3920)
  Top Layer w30: R4.2 2734.57,1025.43 v1(2735,1025)
  Top Layer w50: J10.2 J10.6
  Bottom Layer w20: J10.6 936.31,438.69 970,405 v1(1050,405) 1097.43,405 1410,717.57 1410,725 1430,745 1430,985 1500,1055 2511.71,1055 2512.14,1055.43 2539.57,1055.43 2570,1025 v1(2735,1025) 2880,1025 3275,1420 3275,2170 3395,2290 3605,2290 3770,2455 3770,3770 3605,3935 3535,3935 U4.3
  Bottom Layer w30: v1(2730,3920) 3350,3920 U4.3
SD_CARD_CS: J14.1 U1.32 | length 4927.5
  Top Layer w10: U1.32 2203.07,1236.93 v1(2250,1190)
  Bottom Layer w10: v1(2250,1190) 2360,1080 2880,1080
  Bottom Layer w20: 2880,1080 2880.36,1080 3250,1449.64 3250,2180.36 3384.64,2315 3594.64,2315 3594.64,2324.64 3725,2455 3725,3510 3365,3870 3000,3870 2928.07,3798.07 J14.1
SDA: J5.20 J10.3 J10.7 R3.2 U1.36 U2.3 U4.2 U9.5 U15.5 | length 10814.6
  Top Layer w10: J5.20 1625,3395 1800,3570 1970,3570 1990.63,3590.63 U2.3 1990.63,3700.63 2020,3730 2150,3730 ; U1.36 2323.58,1406.42 2390,1340 2390,1160 v1(2524.57,1025.43) R3.2 ; v1(2615,3920) 2250,3920 2150,3820 2150,3730 ; U9.5@2620,3444.68 U9.5 2509.57,3440.43 2220,3730 2150,3730
  Top Layer w20: v1(985,300.69) 985,510 1030,555 U15.5
  Top Layer w50: J10.3 J10.7
  Bottom Layer w20: J10.7 v1(985,300.69) 1035.69,300.69 1455,720 1455,935 1550,1030 1825,1030 1829.57,1025.43 v1(2524.57,1025.43) 2560,990 2855,990 2865,1000 2890.36,1000 3300,1409.64 3300,2159.64 3405.36,2265 3625,2265 3795,2435 3795,3795 3600,3990 3600,4065 3570,4095 3381.63,4095 3350,4063.37 U4.2
  Bottom Layer w30: v1(2615,3920) 2670,3975 3224.29,3975 3229.29,3970 3270.71,3970 3275.71,3975 3305,3975 U4.2
SDI: J5.2 J14.2 U1.5 | length 4698.7
  Top Layer w10: 1695,2455 1695,1651.36 1782.46,1563.9 U1.5
  Top Layer w20: J5.2 v1(1675,3010) 1675,2475 1695,2455
  Bottom Layer w20: v1(1675,3010) 1675,3230 1590,3315 1590,3480 1520,3550 1290,3550 1220,3620 1220,3805 1299.57,3884.57 2475.43,3884.57 2525,3835 2750,3835 2829.65,3755.35 J14.2
SDO: J5.1 J14.7 U1.6 | length 4004.6
  Top Layer w10: 1675,2415 1675,1645 1775.79,1544.21 U1.6
  Top Layer w20: J5.1 1625,2465 1675,2415
  Top Layer w30: v1(1550,3460) 1630,3460 v1(1665,3495) ; v1(1565,3125) J5.1 J5.1
  Bottom Layer w20: v1(1550,3460) 1550,3267.57 1500,3217.57 1500,3155 1530,3125 v1(1565,3125) ; v1(1665,3495) 1665,3525 1565,3625 1320,3625 1280,3665 1280,3710 1305,3735 2195,3735 2340.47,3589.53 J14.7
SIGNAL_IN0: J3.3 U1.46 | length 2520.3
  Top Layer w10: v1@2162.5,1600 v1(2160,1600) 2163.27,1603.27 U1.46
  Top Layer w30: J3.3 420,2300.69 420,2200 470,2150 1260,2150 v1(1290,2120)
  Bottom Layer w30: v1(1290,2120) 1290,1830 1520,1600 v1(2160,1600)
SIGNAL_IN1: J3.7 U1.49 | length 2266.9
  Top Layer w10: v1(2190,1640) 2203.07,1653.07 U1.49
  Top Layer w30: J3.7 610,2307.54 610,2260 660,2210 1270,2210 1340,2140 v1(1340,2120)
  Bottom Layer w30: v1(1340,2120) 1340,1850 1550,1640 v1(2190,1640)
SIGNAL_IN2: J1.3 U1.50 | length 2909.7
  Top Layer w10: U1.50 2183.39,1763.39 2200,1780 2220,1780 2240,1760 v1(2240,1720)
  Top Layer w30: J1.3 420,3000.69 420,2890 490,2820 780,2820 1410,2190 v1(1410,2120)
  Bottom Layer w30: v1(1410,2120) 1410,1860 1550,1720 v1(2240,1720)
SIGNAL_IN3: J1.7 U1.51 | length 2563.1
  Top Layer w10: U1.51 2163.7,1783.7 v1(2190,1810)
  Top Layer w30: J1.7 697.54,2920 800,2920 1470,2250 v1(1470,2120)
  Bottom Layer w30: v1(1470,2120) 1470,1880 1580,1770 2150,1770 v1(2190,1810)
SOSCIN: C4.2 U1.47 Y2.2 | length 864
  Top Layer w10: U1.47 2322.95,1622.95 2330,1630 2330,1730 2490,1890 2610,1890 2655.43,1935.43 Y2.2@2655.43,2082.99
  Top Layer w50: Y2.2 2655.43,2082.99 C4.2
SOSCOUT: R13.1 U1.48 | length 221.9
  Top Layer w10: U1.48 R13.1@2275.91,1864.57
UARTRX1: U1.34 U11.5 | length 3198.8
  Top Layer w10: U1.34 2320.53,1367.05 2340,1347.57 2340,1290 2320,1270 2320,1080 2500,900 2710,900 3240,1430 3240,2130 2970,2400 2800,2400 2700,2500 2700,2640 2666.02,2673.98 U11.5
UARTRX2: U1.58 U10.9 U13.1 | length 4558.4
  Top Layer w10: v1@1980,1840 v1(1980,1830) 1980,1825.91 2025.91,1780 U1.58
  Top Layer w20: v1(570,3870) 610.43,3829.57 U10.9 ; U13.1 1025,4350 1045,4330 v1(1045,4310)
  Top Layer w30: v1(1420,3420) 1420,2480 1590,2310 1590,1840 v1(1600,1830)
  Bottom Layer w10: v1@1610,1840 1615,1845 ; v1(1980,1830) v1@1980,1840
  Bottom Layer w30: v1(1045,4310) 1045,3970 945,3870 v1(570,3870) 520,3820 520,3550 650,3420 v1(1420,3420) ; v1(1600,1830) v1(1980,1830)
UARTRX3: J5.12 U1.53 | length 1941.9
  Top Layer w10: U1.53 2124.33,2320 v1(2204.33,2400)
  Top Layer w20: J5.12 2025,3335 2050,3360 v1(2195,3360)
  Bottom Layer w20: v1(2195,3360) 2195,2525 2204.33,2515.67 v1(2204.33,2400)
UARTTX1: U1.33 U11.1 | length 3756.9
  Top Layer w10: U1.33 2275.91,1284.09 2290,1270 2290,1070 2490,870 2710,870 3270,1430 3270,2142.43 3030,2382.43 v1(3030,2400)
  Top Layer w20: v1(2480,2830) 2533.66,2776.34 U11.1
  Bottom Layer w30: v1(2480,2830) 2480,2440 2520,2400 v1(3030,2400)
UARTTX2: U1.59 U10.11 U13.4 | length 4728
  Top Layer w10: v1(1930,1870) 1930,1840.78 2006.22,1764.56 U1.59
  Top Layer w20: v1(570,3790) 581.61,3778.39 U10.11 ; U13.4 v1(840,4430)
  Top Layer w30: v1(1500,3260) 1500,2490 1640,2350 v1(1640,1880)
  Bottom Layer w30: v1(840,4430) 990,4430 1085,4335 1085,3915 960,3790 v1(570,3790) 570,3580 690,3460 1435,3460 1500,3395 v1(1500,3260) ; v1(1640,1880) 1650,1870 v1(1930,1870)
UARTTX3: J5.13 U1.52 | length 2121.7
  Top Layer w10: U1.52 2144.02,2265 2194.02,2315 v1(2200,2315)
  Top Layer w20: J5.13 1975,3335 2040,3400 v1(2195,3400)
  Bottom Layer w20: v1(2195,3400) 2235,3400 2270,3365 2270,2385 v1(2200,2315)
USB_DATA+: J4.3 U11.15 | length 591.3
  Top Layer w20: U11.15 3183.66,2443.66 3313.31,2573.31 J4.3
USB_DATA-: J4.2 U11.16 | length 495.4
  Top Layer w20: U11.16 3119.25,2469.25 3234.57,2584.57 J4.2
VBAT: F1.1 J1.1 J1.5 J2.1 J2.2 J3.1 J3.5 J6.1 J6.5 J8.1 J8.5 J9.1 J13.4 | length 2723.4
  Top Layer w30: J2.2 J2.1 1700,660 v1(1720,640)
  Bottom Layer w30: 1395,75 1395,545 1460,610 1690,610 v1(1720,640)
  Bottom Layer w100: 103.31,2676.69 J3.1 J3.5 ; 113.31,1976.69 J6.1 J6.5 ; 123.31,3376.69 J1.1 J1.5 ; 133.31,1276.69 J8.1 J8.5 ; 153.39,3886.61 J13.4
VBAT_RTC: J11.1 U9.3 | length 957.1
  Top Layer w30: J11.1@2740,3740.04 2839.96,3740.04 2900,3680 2900,3420 2870.43,3390.43 U9.3
  Top Layer w50: J11.1@2340,3740.04 J11.1@2740,3740.04
VCAP: C10.2 U1.56 | length 290.3
  Top Layer w10: U1.56 2065.28,1804.72 2035,1835 2035,1929.57 C10.2
pads on no net: D1.2 D2.2 F1.0 J1.0 J2.0 J3.0 J4.0 J5.0 J6.0 J7.6 J7.7 J7.8 J8.0 J10.0 J13.0 J14.0 J14.8 J14.9 J14.10 U1.8 U1.24 U1.27 U1.28 U2.5 U4.4 U4.5 U6.4 U6.5 U9.7 U10.10 U11.2 U11.3 U11.6 U11.8 U11.9 U11.10 U11.11 U11.12 U11.13 U11.14 U11.19 U11.24 U11.27 U11.28 U12.1 U17.3 U18.2 Y3.0

## Polygon pours and split planes (outlines as drawn)
VBAT on Bottom Layer "Top Layer-No Net" (solid, remove dead copper, pour order 2): 3510,350 3860,350 3860,2150 3710,2300 3460,2300 3360,2200 3360,1870 3660,1565 3660,800 3510,650
+3V3 on Bottom Layer "Top Layer-No Net" (solid, remove dead copper, pour order 33): 0,4540 3840,4540 3840,0 0,0 0,4540
VBAT on Bottom Layer "Top Layer-No Net" (solid, remove dead copper, pour order 29): 210,4510 230,4490 230,160 240,150 330,100 3420,100 3490,130 3490,660 3840,660 3840,0 0,0 0,4510
NetC29_2 on Bottom Layer "Top Layer-No Net" (solid, remove dead copper, pour order 6): 3304.38,1900 3304.38,1400 2860,950 2860,900 2860,800 3650,800 3650,1550 3304.38,1900
+5V on Top Layer "Top Layer-No Net" (solid, remove dead copper, pour order 12): 1785,300 1910,300 1935,275 1935,100 2060,100 2160,200 2160,525 2210,575 2610,575 2635,550 2635,350 2385,350 2285,250 2285,0 0,0 0,4540 180,4540 230,4490 230,4100 335,4100 385,4050 385,3975 385,4000 335,3950 235,3950 235,3300 360,3300 385,3275 385,3200 360,3175 235,3175 235,2600 360,2600 385,2575 385,2500 360,2475 235,2475 235,1900 360,1900 385,1875 385,1800 360,1775 235,1775 235,1200 360,1200 385,1175 385,1100 360,1075 235,1075 235,150 310,75 1735,75 1785,125
+5V on Top Layer "Top Layer-No Net" (solid, remove dead copper, pour order 16): 2300,830 2400,830 2410,820 2410,550 2400,540 2290,540 2290,820
GND on Top Layer "Top Layer-No Net" (solid, pour order 21): 0,0 3840,0 3840,4540 0,4540
+3V3 on Top Layer "Top Layer-No Net" (solid, remove dead copper, pour order 18): 1470,600 1660,600 1660,410 1670,400 1710,360 1960,360 1960,300 1790,300 1770,280 1610,280 1600,270 1600,170 1480,170 1470,180 1470,600
PRE_+5V on Top Layer "Top Layer-No Net" (solid, remove dead copper, pour order 10): 2650,390 2650,500 2880,500 2810,500 2810,580 2860,630 2860,800 3230,800 3200,800 3180,800 3240,740 3270,740 3440,740 3450,730 3460,720 3460,680 3460,670 3440,650 3380,590 3010,590 2980,590 2960,570 2960,390 2650,390

## Keep-outs
Keep-Out Layer:
  the board outline again, w50

## Other copper
Bottom Layer:
  rectangle net GND: 2170,1840 2790,2285
  rectangle net GND: 2830,2925 3155,3445
  rectangle net GND: 2475,1145.29 2838.67,1760

## Silkscreen, mask and mechanical layers (free items; w line width, h text height)
Top Overlay:
  text "Notus Rev 1.0" at 2795,4465 h30